# EAGLE board %C2%B5AvaNut (EAGLE 6.2)
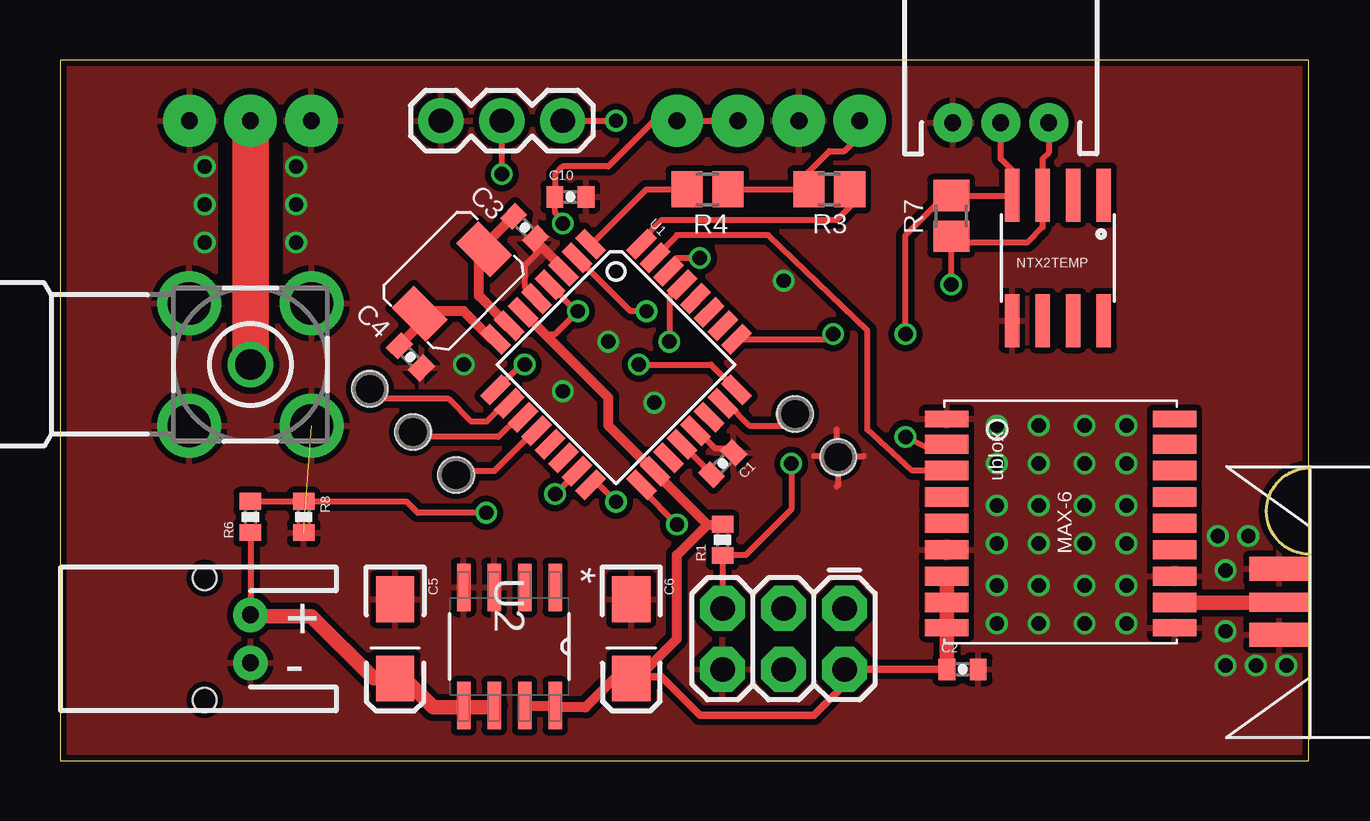
[diagram p0: board, top side]
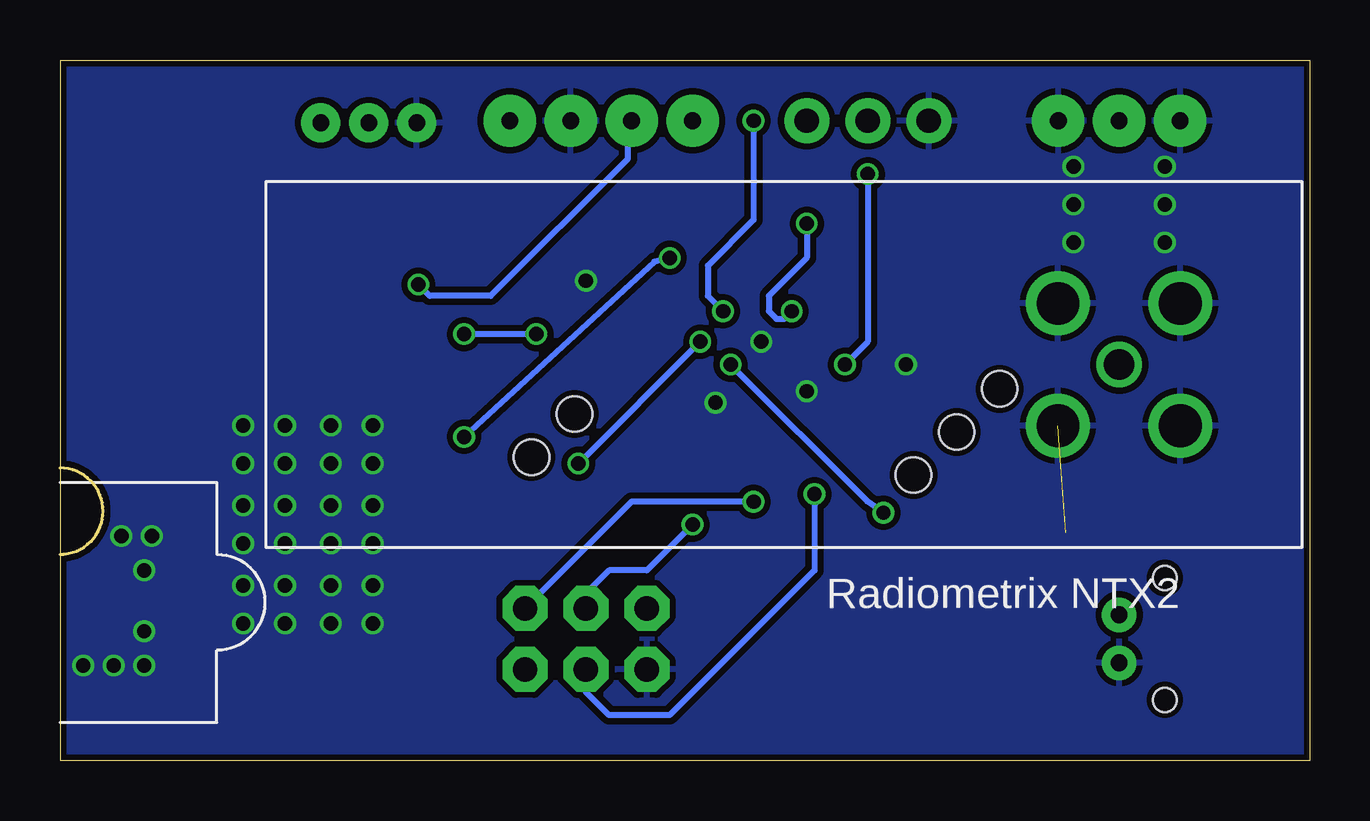
[diagram p1: board, bottom side, seen from below]

Size 52.09 x 29.2 mm. Coordinates in mm from the lower left corner, seen from the top.
Outline: 0,0 52.06,0 52.06,29.2 0,29.2 0,0
Copper layers (1*16): Top 0.035mm / dielectric 1.5mm / Bottom 0.035mm
Design rules: minimum track width 6mil, minimum drill 12mil, track to track 6mil, track to pad 6mil, pad to pad 6mil, via to via 6mil, smd to smd 0mil, copper to edge 10mil, drill to drill 10mil, minimum pad ring 10mil, minimum via ring 6mil, stop-mask expansion 2mil, vias tented up to drill 100mil, thermal gap 10mil
Net classes: 1 vcc: width 0.254 mm
tRestrict: area 6.8,19.2 to 9,25.7

## Footprints (pad centres in the part's own frame; a part is rotated, then mirrored left to right if it is on the bottom)
0402-CAP = smd 0.7 x 0.9: 1 -0.65,0; 2 0.65,0
EIA3216-KIT = smd 1.9 x 1.6: A 1.65,0; C -1.65,0
1X03 = drill 1.016 pad 1.88: 1 0,0; 2 2.54,0; 3 5.08,0
2X3 = drill 1.016 pad 1.88 octagon: 1 0,0; 2 0,2.54; 3 2.54,0; 4 2.54,2.54; 5 5.08,0; 6 5.08,2.54
1X03_PP_HOLES_ONLY = drill 0.9 pad 0.813: 1 0,0; 2 2.54,0; 3 5.08,0 | hole 1.473: 0,0; 2.54,0; 5.08,0
1X02_PP_HOLES_ONLY = drill 0.889 pad 0.813: 1 0,0; 2 2.54,0 | hole 1.473: 0,0; 2.54,0
JST-3-PTH = drill 0.7 pad 1.626: 1 -2,-5; 2 0,-5; 3 2,-5
DS18B20_SOIC = smd 0.61 x 2.21: DQ 1.905,-2.616; GND 1.905,2.616; NC -1.905,-2.616; NC2 -0.635,-2.616; NC3 -1.905,2.616; NC4 -0.635,2.616; NC5 0.635,2.616; VCC 0.635,-2.616
0402-RES = smd 0.7 x 0.9: 1 -0.65,0; 2 0.65,0
R0805 = smd 1.3 x 1.5: 1 -0.85,0; 2 0.85,0
TQFP32-08 = smd 1.27 x 0.559: 1 -4.293,2.8; 2 -4.293,2; 3 -4.293,1.2; 4 -4.293,0.4; 5 -4.293,-0.4; 6 -4.293,-1.2; 7 -4.293,-2; 8 -4.293,-2.8; 17 4.293,-2.8; 18 4.293,-2; 19 4.293,-1.2; 20 4.293,-0.4; 21 4.293,0.4; 22 4.293,1.2; 23 4.293,2; 24 4.293,2.8 | smd 0.559 x 1.27: 9 -2.8,-4.293; 10 -2,-4.293; 11 -1.2,-4.293; 12 -0.4,-4.293; 13 0.4,-4.293; 14 1.2,-4.293; 15 2,-4.293; 16 2.8,-4.293; 25 2.8,4.293; 26 2,4.293; 27 1.2,4.293; 28 0.4,4.293; 29 -0.4,4.293; 30 -1.2,4.293; 31 -2,4.293; 32 -2.8,4.293
SOIC127P600X175-8N = smd 1.981 x 0.559: 1 -2.464,1.905; 2 -2.464,0.635; 3 -2.464,-0.635; 4 -2.464,-1.905; 5 2.464,-1.905; 6 2.464,-0.635; 7 2.464,0.635; 8 2.464,1.905
UBLOX_MAX-6 = smd 1.8 x 0.7: 1_GND 4.95,-4.4; 9_V_RESET 4.95,4.3; 10_GND -4.55,4.3; 18_RESERVED -4.55,-4.4 | smd 1.8 x 0.8: 2_TXD1 4.95,-3.35; 3_RXD1 4.95,-2.25; 4_TIMEPULSE 4.95,-1.15; 5_EXTINT0 4.95,-0.05; 6_V_BCKP 4.95,1.05; 7_VCC_IO 4.95,2.15; 8_VCC 4.95,3.25; 11_RF_IN -4.55,3.25; 12_GND -4.55,2.15; 13_ANTON -4.55,1.05; 14_VCC_RF -4.55,-0.05; 15_RESERVED -4.55,-1.15; 16_SDA2 -4.55,-2.25; 17_SCL2 -4.55,-3.35
ABRACON_ABM3_CRYSTAL = smd 1.3 x 2: P$1 -3.4,0.1; P$2 0.4,0.1
SARANTEL-SR1202 = smd 2.5 x 0.8: FEED 0,0 | smd 2.5 x 1: GND1 0,1.4; GND2 0,-1.35
NTX2 = drill 0.7 pad 2.184: 0V -2.54,-10.16; EN -7.62,-10.16; RFGND -22.86,-10.16; RFGND2 -27.94,-10.16; RFOUT -25.4,-10.16; TXD 0,-10.16; VCC -5.08,-10.16
M02-JST-PTH = drill 0.7 pad 1.448: 1 -1,0; 2 1,0 | hole 1: -2.54,1.905; 2.54,1.905
BU-SMA-H = drill 1.27: 1 0,0 | drill 1.778: 2 -2.55,2.55; 3 2.55,2.55; 4 2.55,-2.55; 5 -2.55,-2.55

## Placement (x,y rotation side)
C1  0.1uF  [0402-CAP]  27.62,12.38 225 top
C2  0.1uF  [0402-CAP]  37.62,3.81 0 top
C3  18pF  [0402-CAP]  19.37,22.23 315 top
C4  18pF  [0402-CAP]  14.6,16.83 315 top
C5  [EIA3216-KIT]  13.97,5.08 270 top
C6  4.7uF  [EIA3216-KIT]  23.81,5.08 270 top
C10  0.1uF  [0402-CAP]  21.27,23.5 0 top
DBS  [1X03]  15.88,26.67 0 top
J1  AVR_SPI_PRG_6PTH  [2X3]  32.7,6.35 180 top
JP1  [1X03_PP_HOLES_ONLY]  16.51,11.91 135 top
JP2  [1X02_PP_HOLES_ONLY]  30.64,14.45 315 top
JP6  [JST-3-PTH]  39.21,31.59 0 top
NTX2TEMP  DS1821  [DS18B20_SOIC]  41.59,20.95 180 top
R1  10k  [0402-RES]  27.62,9.21 90 top
R3  47K  [R0805]  32.07,23.81 180 top
R4  39k  [R0805]  26.99,23.81 0 top
R6  100k  [0402-RES]  7.94,10.16 90 top
R7  4k7  [R0805]  37.15,22.7 90 top
R8  10k  [0402-RES]  10.16,10.16 270 top
U1  ATMEGA328  [TQFP32-08]  23.18,16.51 315 top
U2  TPS76633D  [SOIC127P600X175-8N]  18.73,4.76 270 top
U$1  UBLOX_MAX-6  [UBLOX_MAX-6]  41.91,9.84 180 top
U$2  ABRACON_ABM3_CRYSTAL  [ABRACON_ABM3_CRYSTAL]  17.46,20.95 45 top
U$3  SARANTEL-SR1202  [SARANTEL-SR1202]  50.82,6.6 0 top
U$4  NTX2  [NTX2]  33.34,16.51 180 bottom
U$6  M02-JST-PTH  [M02-JST-PTH]  7.94,5.08 90 top
X1  BU-SMA-H  [BU-SMA-H]  7.94,16.51 180 top

## Library data of the parts
C1-C6 C10 DBS J1 JP1 JP2 JP6 R1 R6 R8 U1 = SparkFun
NTX2TEMP U$1-U$4 U$6 = ava
R3 R4 R7 = resistor
U2 = ava; DESCRIPTION: ULTRALOW QUIESCENT CURRENT 250-mA LOW DROPOUT VOLTAGE REGULATORS; MPN: TPS76633D; OC_FARNELL: 8461422; OC_NEWARK: 77C1060; PACKAGE: SOIC-8; SUPPLIER: Texas Instruments
X1 = con-coax; OC_FARNELL: unknown; OC_NEWARK: unknown

## Nets
AREF: C1.2 U1.20
GND [vcc]: C1.1 C2.2 C3.2 C4.2 C5.C C6.C C10.2 DBS.1 J1.6 JP2.2 JP6.1 NTX2TEMP.GND R8.2 U1.3 U1.5 U1.21 U2.3 U2.4 U$1.1_GND U$1.6_V_BCKP U$1.10_GND U$1.12_GND U$3.GND1 U$3.GND2 U$4.0V U$4.RFGND U$4.RFGND2 U$6.1 X1.2 X1.3 X1.4 X1.5
MISO: J1.1 U1.16
MOSI: J1.4 U1.15
N$1: U$4.RFOUT X1.1
N$2: R3.2 R4.2 U$4.TXD
N$4: U$1.11_RF_IN U$3.FEED
N$9: C3.1 U1.7 U$2.P$2
N$10: C4.1 U1.8 U$2.P$1
NSS_RX: DBS.2 U1.9
NSS_TX: DBS.3 U1.2
PB0: JP1.1 U1.12
PB1: U1.13
PC0: JP2.1 U1.23
PD6: JP1.3 U1.10
PD7: JP1.2 U1.11
RADIO_MARK: R3.1 U1.32
RADIO_SPACE: R4.1 U1.1
RESET: J1.5 R1.1 U1.29
SCK: J1.3 U1.17
TEMPSENSORS: JP6.2 NTX2TEMP.DQ R7.2 U1.25
UBLOX_RXD: U1.31 U$1.3_RXD1
UBLOX_TXD: U1.30 U$1.2_TXD1
VBATT [vcc]: C5.A R6.1 U2.5 U2.6 U$6.2
VBATTADC: R6.2 R8.1 U1.24
VCC: C2.1 C6.A C10.1 J1.2 JP6.3 NTX2TEMP.VCC R1.2 R7.1 U1.4 U1.6 U1.18 U2.7 U2.8 U$1.7_VCC_IO U$1.8_VCC U$1.9_V_RESET U$4.EN U$4.VCC

## Tracks (layer width: path | path; a pad name or v marks a point on that pad's centre or on a via)
AREF
  Top 0.254: C1.2 27.16,11.96 U1.20
GND  (via drill 0.6)  (1 unrouted)
  Top 0.254: C3.2 19.83,21.56 U1.3 20.99,20.6 20,21.59 20,21.27 19.37,20.64 19.37,19.75 U1.5 | U1.21 26.56,13.76 27.31,13.02 27.91,13.02 C1.1 | JP2.2 32.43,11.48 32.38,11.43 | 32.38,12.7 33.5,12.7 | 32.38,12.7 32.38,13.81 | 32.38,12.7 31.43,12.7
  other vias: 22.86,17.46 9.84,21.59 9.84,24.77 9.84,23.18 6.03,24.77 6.03,23.18 6.03,21.59 48.58,7.94 48.58,5.4 44.45,5.72 42.7,5.72 40.8,5.72 39.05,5.72 44.45,7.3 42.7,7.3 40.8,7.3 39.05,7.3 44.45,9.05 42.7,9.05 40.8,9.05 39.05,9.05 44.45,10.64 42.7,10.64 40.8,10.64 39.05,10.64 44.45,12.38 42.7,12.38 40.8,12.38 39.05,12.38 44.45,13.97 42.7,13.97 40.8,13.97 39.05,13.97 49.53,9.37 48.26,9.37 51.12,3.97 48.58,3.97 49.85,3.97 30.16,20 20.95,15.4 16.83,16.51 24.77,14.92
  pour Top (isolate 0.254): 0,29.21 52.07,29.21 52.07,0 0,0
  pour Bottom (isolate 0.254): 0,29.21 52.07,29.21 52.07,0 0,0
MISO  (via drill 0.6)
  Top 0.254: U1.16 22.48,11.5 v23.18,10.8
  Bottom 0.254: v23.18,10.8 28.26,10.8 J1.1
MOSI  (via drill 0.6)
  Top 0.254: U1.15 21.56,12.03 v20.64,11.11
  Bottom 0.254: v20.64,11.11 20.64,7.94 26.67,1.91 29.21,1.91 30.16,2.86 J1.4
N$1
  Top 1.52: U$4.RFOUT X1.1
N$2
  Top 0.254: R4.2 R3.2 31.22,24.55 32.07,25.4 32.7,25.4 33.34,26.03 U$4.TXD
N$4
  Top 0.61: U$1.11_RF_IN 49.45,6.59 U$3.FEED
N$9
  Top 0.406: U1.7 18.7,18.13 17.46,19.37 17.46,21.1 U$2.P$2 17.67,21.45 C3.1
N$10
  Top 0.406: U1.8 17.99,17.56 16.83,18.73 15.56,18.73 | 15.56,18.73 15.1,18.73 U$2.P$1 | C4.1 14.15,17.32 15.56,18.73
NSS_RX  (via drill 0.6)
  Top 0.254: DBS.2 v18.41,24.45 | v19.37,16.51 19.22,16.51 U1.9
  Bottom 0.254: v18.41,24.45 18.41,17.46 v19.37,16.51
NSS_TX  (via drill 0.6)
  Top 0.254: DBS.3 v23.18,26.67 | v24.45,18.73 23.78,18.73 U1.2
  Bottom 0.254: v23.18,26.67 23.18,22.54 25.08,20.64 25.08,19.37 v24.45,18.73
PB0
  Top 0.254: U1.12 19.79,13.76 18.1,12.07 16.67,12.07 JP1.1
PC0
  Top 0.254: U1.23 27.81,14.89 28.73,13.97 30.16,13.97 JP2.1
PD6
  Top 0.254: U1.10 18.54,14.89 17.78,14.13 17.15,14.13 16.19,15.08 13.33,15.08 JP1.3
PD7
  Top 0.254: U1.11 19.09,14.32 18.26,13.49 14.92,13.49 JP1.2
RADIO_MARK
  Top 0.254: U1.32 24.23,21.69 25.08,22.54 32.38,22.54 33.34,23.5 33.24,23.5 R3.1
RADIO_SPACE
  Top 0.254: U1.1 22.16,21.53 24.45,23.81 R4.1
RESET  (via drill 0.6)
  Top 0.254: J1.5 R1.1 27.64,8.57 28.57,8.57 30.48,10.48 v30.48,12.38 | U1.29 25.86,19.83 25.4,19.37 v25.4,17.46
  Bottom 0.254: v25.4,17.46 v30.48,12.38
SCK  (via drill 0.6)
  Top 0.254: U1.17 24.23,11.33 v25.72,9.84
  Bottom 0.254: v25.72,9.84 27.62,7.94 29.21,7.94 30.16,6.98 J1.3
TEMPSENSORS  (via drill 0.6)
  Top 0.254: 39.67,23.55 R7.2 36.93,23.34 36.67,23.34 35.24,21.91 v35.24,17.78 | NTX2TEMP.DQ 39.69,24.61 39.21,25.08 JP6.2 | U1.25 32.01,17.56 v32.23,17.78
  Top 0.406: 39.67,23.55 NTX2TEMP.DQ
  Bottom 0.254: v32.23,17.78 v35.24,17.78
UBLOX_RXD
  Top 0.254: U$1.3_RXD1 35.53,12.09 33.66,13.81 33.66,17.94 29.53,21.91 25.72,21.91 25.72,21.88 U1.31
UBLOX_TXD  (via drill 0.6)
  Top 0.254: U1.30 25.36,20.6 25.72,20.95 v26.67,20.95 | 36.82,13.34 U$1.2_TXD1 36.78,13.02 36.2,13.02 v35.24,13.49
  Bottom 0.254: v26.67,20.95 27.31,20.8 v35.24,13.49
VBATT
  Top 0.254: R6.1 U$6.2
  Top 0.61: U$6.2 7.99,6.03 10.48,6.03 13.08,3.43 C5.A 14.35,3.43 15.56,2.22 16.9,2.22 | U2.6 18.02,2.22 16.9,2.22 | 16.9,2.22 U2.5
VBATTADC  (via drill 0.6)
  Top 0.254: R6.2 R8.1 10.17,10.8 14.45,10.8 14.91,10.33 v17.77,10.33 | v24.13,16.51 27.14,16.51 U1.24
  Bottom 0.254: v17.77,10.33 18.43,10.81 v24.13,16.51
VCC  (via drill 0.6)
  Top 0.254: 32.7,3.18 J1.2 | v20.95,22.38 20.62,22.88 C10.1 20.64,24.45 20.95,24.77 22.86,24.77 24.77,26.67 U$4.EN U$4.VCC | U1.4 21.52,18.73 v21.59,18.73 20.64,17.78 20.32,17.78 19.4,18.7 U1.6 | 36.96,3.96 C2.1 | 37.41,21.59 40.32,21.59 40.96,22.23 NTX2TEMP.VCC 40.96,25.08 41.21,25.34 JP6.3 | v37.15,19.84 R7.1
  Top 0.305: 24.13,3.49 25.08,3.49 26.67,1.91 31.43,1.91 32.7,3.18 | J1.2 C2.1
  Top 0.406: U2.7 U2.8 20.71,2.22 21.91,2.22 23.11,3.43 C6.A 24.07,3.43 24.13,3.49 25.72,5.08 25.72,8.57 26.99,9.84 | 26.99,9.84 27.61,9.84 R1.2 | 26.99,9.84 24.8,12.03 U1.18 24.77,12.06 22.86,13.97 22.86,15.13 U1.6 | 37.41,21.59 R7.1
  Top 0.61: U$1.7_VCC_IO U$1.8_VCC U$1.9_V_RESET 36.96,3.96
  Bottom 0.254: v20.95,22.38 20.95,20.95 22.54,19.37 22.54,18.73 22.22,18.42 21.91,18.42 v21.59,18.73 | U$4.VCC 28.42,26.51 28.42,25.08 34.13,19.37 36.67,19.37 v37.15,19.84

## Text on the board
tPlace: + | -